# Altium PCB PCB_buck_converter_1_2024-08-31.pcbdoc
Units mm, origin at the board's own origin, x right, y up, seen from the top; angles counter-clockwise.
Board outline 82.04 x 82.98 mm, 2 copper layers (Top Layer, Bottom Layer); 31 components, 13 nets, 62 pads, 136 vias.
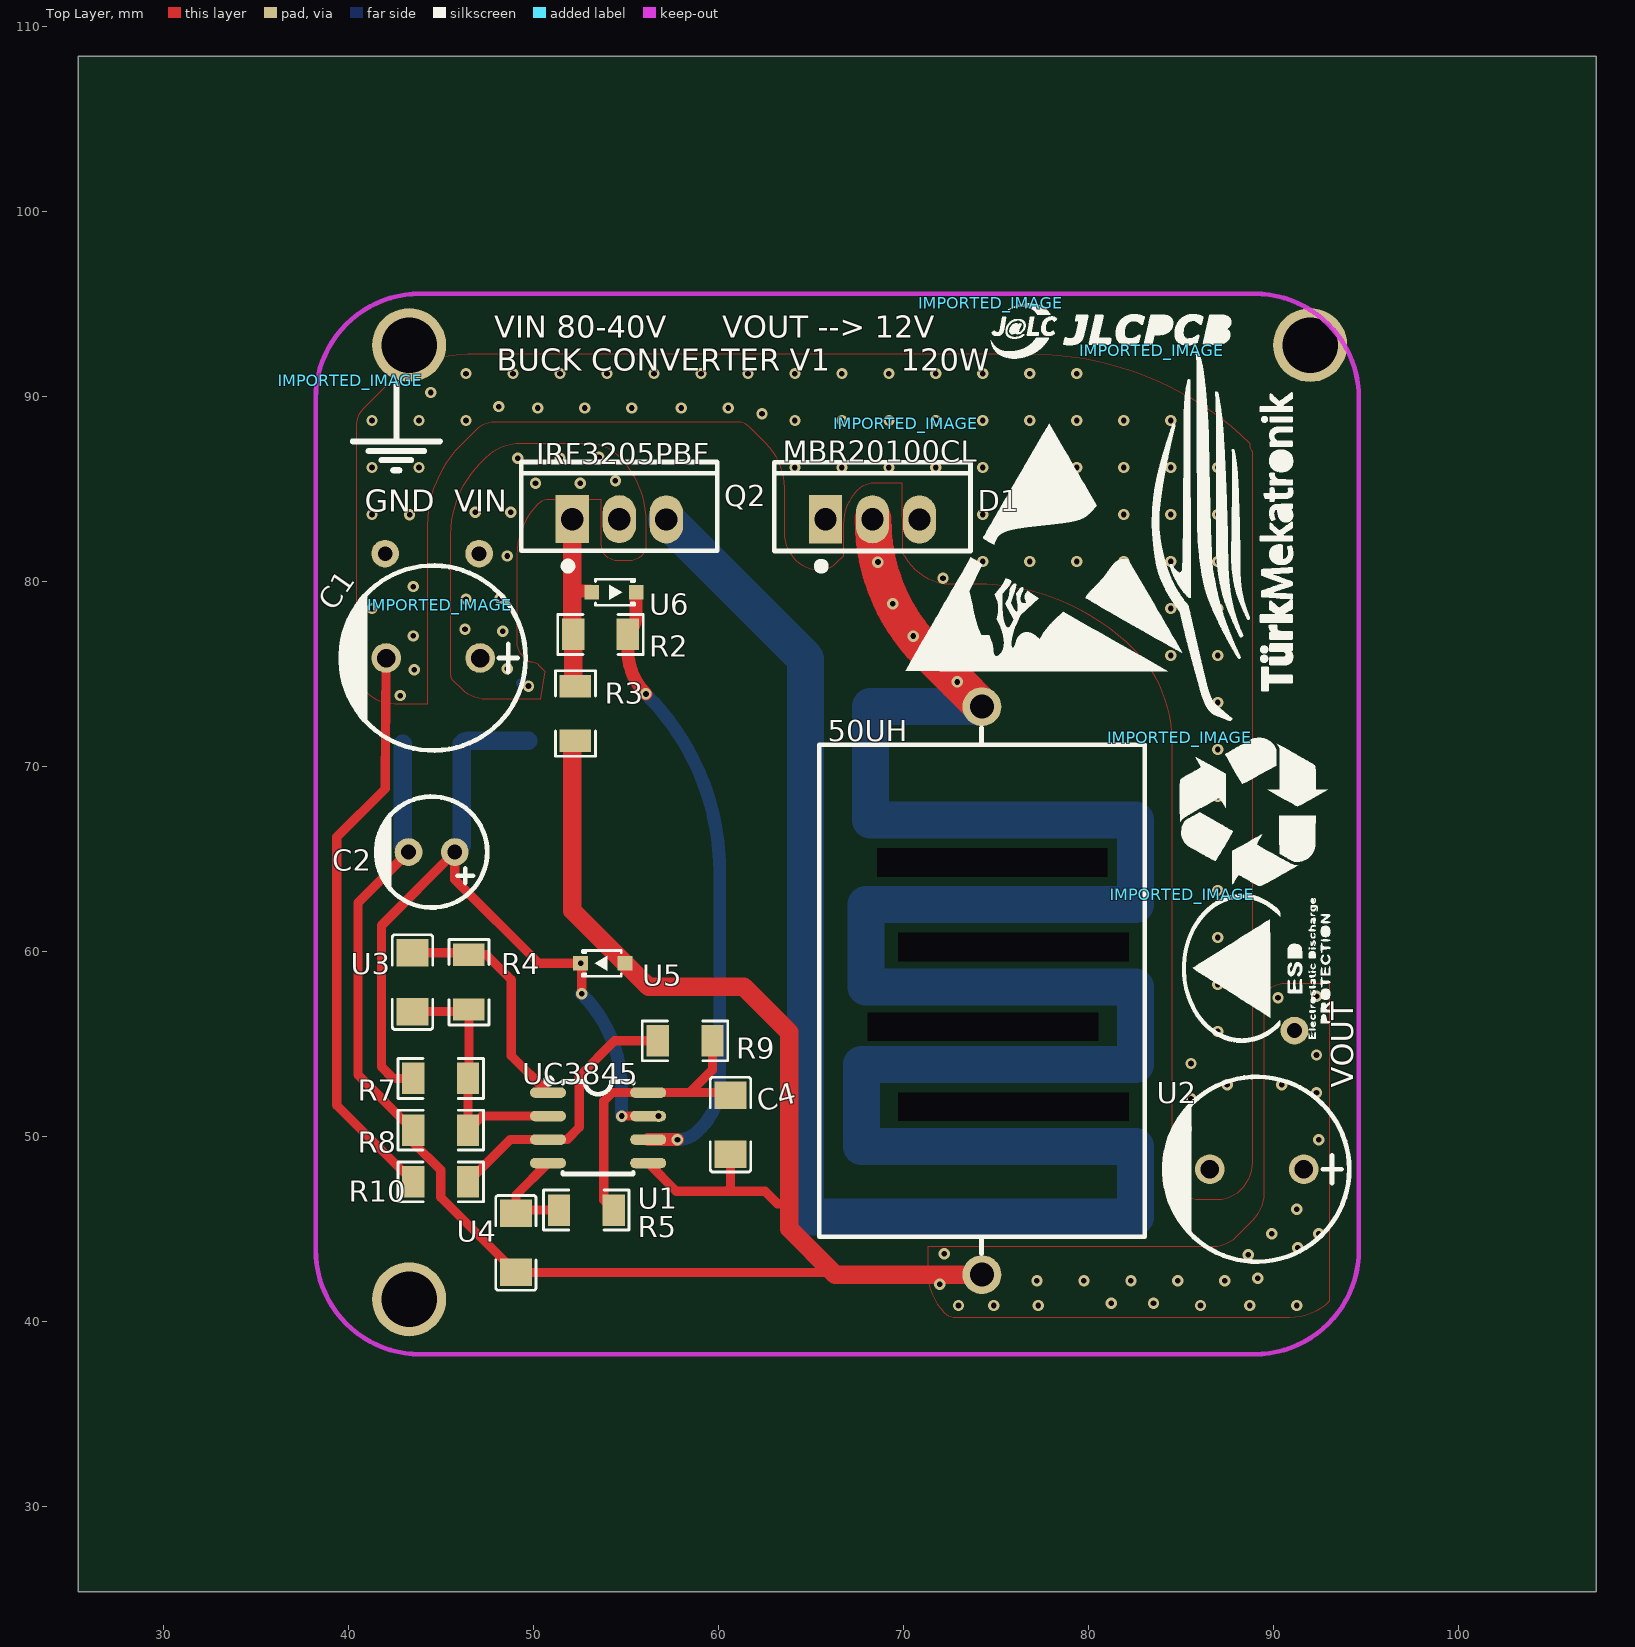
[diagram p0: Top Layer view]
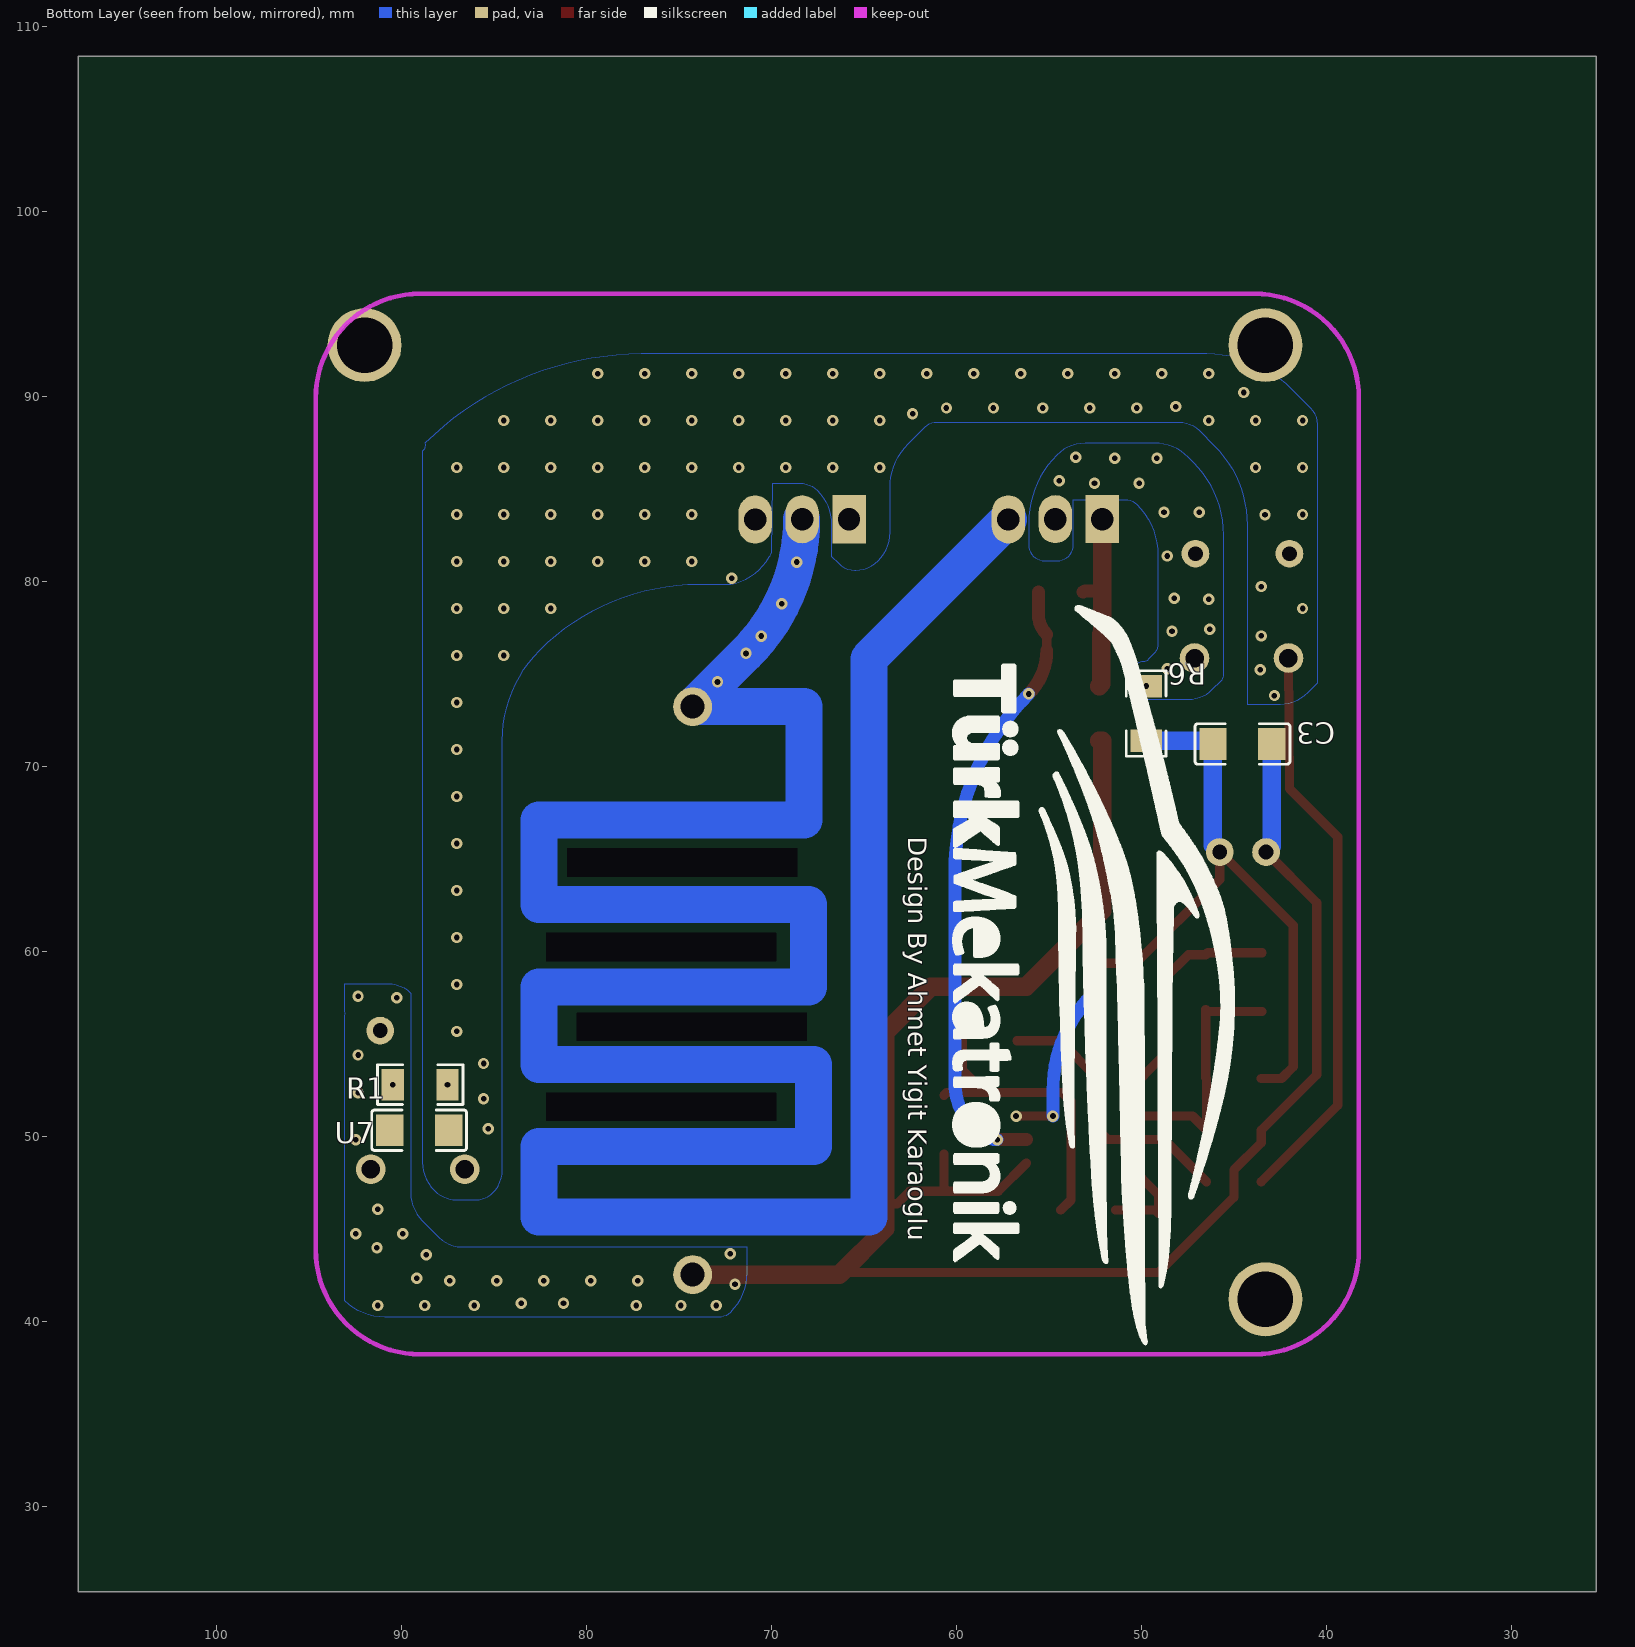
[diagram p1: Bottom Layer view, seen from below]

## Layer stack, top to bottom
Top Layer: signal copper (thickness not stored)
Dielectric: dielectric 0.32, FR-4, Dk 4.8
Bottom Layer: signal copper (thickness not stored)

## Board outline
107.442,25.4 25.4,25.4 25.4,108.382 107.442,108.382
cut-out: 69.718,61.005 82.164,61.005 82.164,59.481 82.037,59.481 69.718,59.481 69.718,61.005
cut-out: 68.575,65.577 81.021,65.577 81.021,64.053 80.894,64.053 68.575,64.053 68.575,65.577
cut-out: 68.067,56.687 80.513,56.687 80.513,55.163 80.386,55.163 68.067,55.163 68.067,56.687
cut-out: 69.718,52.369 82.164,52.369 82.164,50.845 82.037,50.845 69.718,50.845 69.718,52.369

## Components (designator, comment, footprint, x,y, rotation, side; value= is the part's Value field where it differs from the comment)
50UH "50uH" IND-TH_L26.6-W17.6-P30.60-D1.2 74.239,57.881 r270 top
C1 "100uF" CAP-TH_BD10.0-P5.00-D1.0-FD 44.572,75.864 r180 top
C2 "100uF" CAP-TH_BD6.0-P2.50-D0.5-FD 44.496,65.374 r180 top
C3 "100nF" C1206#1 44.521,71.216 r180 bottom
C4 "100nF" C1206#2 60.65,50.642 r90 top
D1 "MBR20100CL" TO-220-3_L10.0-W4.5-P2.54-L 68.321,83.357 r0 top
IMPORTED_IMAGE "IMPORTED_IMAGE" IMPORTED_IMAGE 44.93,78.703 r0 top
IMPORTED_IMAGE "IMPORTED_IMAGE" IMPORTED_IMAGE 83.426,92.466 r0 top
IMPORTED_IMAGE "IMPORTED_IMAGE" IMPORTED_IMAGE 84.937,71.543 r0 top
IMPORTED_IMAGE "IMPORTED_IMAGE" IMPORTED_IMAGE 85.068,63.064 r0 top
IMPORTED_IMAGE "IMPORTED_IMAGE" IMPORTED_IMAGE 40.085,90.85 r0 top
IMPORTED_IMAGE "IMPORTED_IMAGE" IMPORTED_IMAGE 74.719,95.041 r0 top
IMPORTED_IMAGE "IMPORTED_IMAGE" IMPORTED_IMAGE 70.117,88.519 r0 top
Q2 "IRF3205PBF" TO-220-3_L10.0-W4.5-P2.54-L 54.636,83.363 r0 top
R1 "360Ω" R1206#1 88.971,52.801 r180 bottom
R2 "2.2" R1206#2 53.62,77.14 r180 top
R3 "5.1k" R1206#2 52.268,72.867 r90 top
R4 "200k" R1206#2 46.508,58.344 r270 top
R5 "3.6k" R1206#2 52.858,46.025 r0 top
R6 "2.7k" R1206#1 49.728,72.867 r90 bottom
R7 "20k" R1206#2 44.984,53.137 r0 top
R8 "5.1k" R1206#2 44.984,50.343 r180 top
R9 "10k" R1206#2 58.192,55.169 r0 top
R10 "1k" R1206#2 44.984,47.549 r180 top
U1 "UC3845" SOIC-8_L5.0-W4.0-P1.27-LS6.0-BL 53.493,50.47 r270 top
U2 "1000uF" CAP-TH_BD10.0-P5.00-D1.0-FD 89.098,48.229 r180 top
U3 "330pF" C1206#2 43.46,58.344 r90 top
U4 "330pF" C1206#2 49.048,44.247 r90 top
U5 "1N4148WS(T4)" SOD-323_L1.7-W1.3-LS2.5-RD 53.747,59.36 r0 top
U6 "1N4148WS(T4)" SOD-323_L1.7-W1.3-LS2.5-RD 54.351,79.42 r180 top
U7 "100nf" C1206#1 89.022,50.337 r180 bottom

## Footprints (in the part's own frame and the unit in brackets; to place one, negate y for a bottom-side part, rotate by r counter-clockwise, add the part's x,y. Pads: shape width x height; smd on the part's side, far side on the other; paste and mask are expansions set on the pad)
C1206#1 [mm]
  rect 1.485x1.728 smd paste-100 mask+0.051: 1(1.593,0) 2(-1.593,0)
  silkscreen extent -2.56,-1.09 2.56,1.09
C1206#2 [mm]
  rect 1.485x1.728 smd paste-100 mask+0.051: 1(-1.593,0) 2(1.592,0)
  silkscreen extent -2.56,-1.09 2.56,1.09
CAP-TH_BD6.0-P2.50-D0.5-FD [mm]
  round 1.5 hole 0.8 paste+0 mask+0.051: 1(-1.25,0) 2(1.25,0)
  silkscreen extent -3,-3 3.08,3
CAP-TH_BD10.0-P5.00-D1.0-FD [mm]
  round 1.6 hole 1 paste+0 mask+0.051: 1(-2.54,0) 2(2.54,0)
  silkscreen extent -5,-5 5.08,5
IMPORTED_IMAGE [mm]
IND-TH_L26.6-W17.6-P30.60-D1.2 [mm]
  round 2.1 hole 1.3 paste+0 mask+0.05: 1(-15.35,0) 2(15.35,0)
  silkscreen extent -14.22,-8.8 14.22,8.8
R1206#1 [mm]
  rect 1.208x1.701 smd paste-100 mask+0.051: 1(1.479,0) 2(-1.479,0)
  silkscreen extent -2.31,-1.08 2.31,1.08
R1206#2 [mm]
  rect 1.208x1.701 smd paste-100 mask+0.051: 1(-1.479,0) 2(1.479,0)
  silkscreen extent -2.31,-1.08 2.31,1.08
SOD-323_L1.7-W1.3-LS2.5-RD [mm]
  rect 0.8x0.8 smd paste+0 mask+0.051: 1(-1.2,0) 2(1.2,0)
  silkscreen extent -1.1,-0.7 1,0.7
SOIC-8_L5.0-W4.0-P1.27-LS6.0-BL [mil]
  oval 22.38x76.78 smd paste+0 mask+2: 1(-75,-106.5) 2(-25,-106.5) 3(25,-106.5) 4(75,-106.5) 5(75,106.5) 6(25,106.5) 7(-25,106.5) 8(-75,106.5)
  silkscreen extent -106,-111 98,75
TO-220-3_L10.0-W4.5-P2.54-L [mm]
  rect 1.8x2.6 hole 1.2 paste+0 mask+0.051: 1(-2.54,0.005)
  oval 1.8x2.6 hole 1.2 paste+0 mask+0.051: 2(0,0.005) 3(2.54,-0.005)
  silkscreen extent -5.3,-2.73 5.3,3.09

## Free pads (board coordinates)
  round 1.5 hole 0.8 paste+0 mask+0.051: 1(91.13,55.722) 2(47.061,81.503) 3(41.981,81.503)
  round 4 hole 3 paste+0.102 mask+0.051: 4(43.276,41.201) 4(43.276,92.781) 4(91.976,92.781)

## Via types
v1: diameter 0.61, hole 0.305, Top Layer to Bottom Layer, tented both sides, 121 vias
v2: diameter 0.62, hole 0.31, Top Layer to Bottom Layer, tented both sides, 15 vias

## Nets (pads, with @x,y where several pads share a name; then routed paths per layer and width w, separated by ;. In a path a pad name is that pad's centre, name@x,y a point inside that pad or via, vN(x,y) a via of type N, cw(c..) or ccw(c..) an arc to the next point about the centre after c; other vN are vias at no path point)
FB: 50UH.2 C2.2 C3.1 C4.1 pad.1 R1.2 R3.1 R8.2 U1.5 U2.1 U4.1 U5.2 U7.2 | length 107.5
  Top Layer w0.5: C2.2 40.508,62.636 40.508,53.34 R8.2 43.505,49.663 44.984,48.184 44.984,46.718 U4.1 66.315,42.654 66.315,42.532 ; U1.5 57.722,47.041 60.478,47.041 60.65,47.213 C4.1 ; 60.224,47.041 62.51,47.041 63.186,46.364 63.823,46.364
  Top Layer w1: R3.1 52.096,71.388 52.096,62.211 U5.2 ; U5.2@54.946,59.36 56.216,58.09 61.367,58.09 63.823,55.634 63.823,45.024 66.316,42.531 50UH.2
  Bottom Layer w1: C3.1 42.928,65.692 C2.2
  other v1: 72.969,40.863 74.874,40.863 77.287,40.863 86.05,40.863 88.717,40.863 81.224,40.99 83.51,40.99 71.953,42.006 77.211,42.209 79.751,42.209 82.291,42.209 84.831,42.209 87.371,42.209 89.149,42.336 88.641,43.606 72.207,43.657 91.308,43.987 89.911,44.749 92.451,44.749 91.257,46.07 92.451,49.829 92.324,52.369 92.324,54.401 90.241,57.5 92.324,57.576
  other v2: 90.45,52.801
GND: C1.2 D1.1 D1.3 pad.3 R1.1 R10.2 U2.2 U7.1 | length 31.1
  Top Layer w0.5: C1.2 41.982,68.803 39.365,66.187 39.365,51.689 R10.2
  other v1: 85.288,50.418 85.542,52.039 85.542,53.944 86.99,55.679 86.99,58.219 86.99,60.759 86.99,63.299 86.99,65.839 86.99,68.379 86.99,70.919 86.99,73.459 42.794,73.832 43.556,75.229 84.45,75.999 86.99,75.999 43.505,77.058 41.27,78.539 81.91,78.539 84.45,78.539 86.99,78.539 43.505,79.725 72.131,80.182 74.29,81.079 76.83,81.079 79.37,81.079 81.91,81.079 84.45,81.079 86.99,81.079 41.27,83.619 43.302,83.611 74.29,83.619 76.83,83.619 79.37,83.619 81.91,83.619 84.45,83.619 86.99,83.619 41.27,86.159 43.81,86.159 64.13,86.159 66.67,86.159 69.21,86.159 71.75,86.159 74.29,86.159 76.83,86.159 79.37,86.159 81.91,86.159 84.45,86.159 86.99,86.159 41.27,88.699 43.81,88.699 46.35,88.699 64.13,88.699 66.67,88.699 69.21,88.699 71.75,88.699 74.29,88.699 76.83,88.699 79.37,88.699 81.91,88.699 84.45,88.699 62.352,89.072 50.236,89.377 52.776,89.377 55.316,89.377 57.983,89.377 60.523,89.377 48.128,89.453 44.445,90.215 46.35,91.239 48.89,91.239 51.43,91.239 53.97,91.239 56.51,91.239 59.05,91.239 61.59,91.239 64.13,91.239 66.67,91.239 69.21,91.239 71.75,91.239 74.29,91.239 76.83,91.239 79.37,91.239
  other v2: 87.492,52.801
OUT: R2.1 U1.6 U6.1 | length 33.7
  Top Layer w0.5: 55.098,76.282 R2.1
  Top Layer w0.7: 55.098,76.282 ccw(c58.438,76.282) v2(56.077,73.921) ; R2.1 ccw(c54.007,78.232) 55.551,78.232 U6.1 ; U1.6 v2(57.78,49.829)
  Bottom Layer w0.7: v2(56.077,73.921) cw(c46.446,64.29) 60.066,64.29 60.066,62.91 60.066,52.917 cw(c56.597,52.917) 59.05,50.464 58.864,50.278 cw(c57.78,51.362) v2(57.78,49.829)
Q2_1: Q2.1 R2.2 R3.2 U6.2 | length 10.2
  Top Layer w0.7: 52.096,79.48 53.007,79.48 cw(c53.007,79.276) U6.2
  Top Layer w1: Q2.1 52.096,77.185 R2.2 52.141,74.473 R3.2
Q2_3: 50UH.1 D1.2 Q2.3 | length 189.7
  Top Layer w2: D1.2@68.352,83.368 ccw(c78.611,83.368) v2(71.356,76.113) v2(72.898,74.572) 50UH.1
  Bottom Layer w2: Q2.3 64.715,75.819 64.715,45.638 82.545,45.638 82.545,49.454 67.717,49.454 67.717,53.893 82.545,53.893 82.545,58.09 67.971,58.09 67.971,62.535 82.545,62.535 82.545,67.107 68.225,67.107 68.225,73.231 50UH.1 v2(71.356,76.113) cw(c78.611,83.368) D1.2@68.352,83.368
  other v2: 70.529,77.048 69.424,78.801 68.617,81.05
S$1126: 
U1_1: R4.1 U1.1 U3.2 | length 12.9
  Top Layer w0.5: U3.2 46.394,59.936 R4.1 47.442,59.823 48.794,58.471 48.794,54.369 U1.1
U1_2: R4.2 R7.2 R8.1 U1.2 U3.1 | length 14.3
  Top Layer w0.5: U3.1 46.394,56.751 R4.2 46.508,53.182 R7.2 R8.1 47.224,51.105 U1.2
U1_4: R5.1 U1.4 U4.2 | length 5.9
  Top Layer w0.5: U1.4 49.048,46.825 U4.2 49.233,46.025 R5.1
U1_7: C2.1 C3.2 R6.2 R7.1 U1.7 U5.1 | length 45.9
  Top Layer w0.5: R7.1 42.408,53.137 41.778,53.766 41.778,61.404 C2.1 ; C2.1 45.746,63.895 50.281,59.36 v2(52.547,59.36) 52.604,59.303 52.604,58.402 v2(52.604,57.709) ; v2(54.763,51.105) U1.7 v2(56.756,51.105)
  Bottom Layer w0.7: v2(52.604,57.709) cw(c47.391,52.496) 54.763,52.496 v2(54.763,51.105)
  Bottom Layer w1: C2.1 46.114,65.741 C3.2 cw(c46.529,70.8) 46.529,71.388 R6.2
U1_8: C4.2 R5.2 R9.2 U1.8 | length 16.5
  Top Layer w0.5: R5.2 53.792,46.569 53.792,51.912 54.255,52.375 U1.8 58.446,52.375 ; R9.2 59.67,53.6 58.446,52.375 ; C4.2 60.51,52.375 58.446,52.375
VIN: C1.1 pad.2 Q2.2 R6.1 | length 0.5
  Bottom Layer w0.5: R6.1@49.312,74.518 cw(c49.312,73.93) v2(49.728,74.346)
  other v1: 48.331,77.312 46.295,77.418 46.35,79.039 48.204,79.09 48.585,81.376 46.858,83.738 48.763,83.738 50.109,85.313 52.522,85.313 54.427,85.44 49.144,86.659 51.43,86.659 53.538,86.71
  other v2: 48.585,75.28
VSENSE: R9.1 R10.1 U1.3 | length 15
  Top Layer w0.5: R10.1 48.748,49.835 U1.3 51.816,49.835 52.477,50.495 52.477,53.264 54.382,55.169 R9.1
copper on no net:
  other v1: 91.257,40.863

## Polygon pours and split planes (outlines as drawn)
VIN on Bottom Layer (solid): 50.363,73.629 47.442,73.629 cw(c47.442,75.469) 46.141,74.168 45.664,74.645 cw(c45.971,74.952) 45.537,74.952 45.537,82.519 cw(c51.056,82.519) 47.153,86.421 47.442,86.71 cw(c49.282,84.87) 49.282,87.472 51.379,87.472 53.021,87.472 cw(c53.021,85.304) 54.554,86.837 cw(c50.875,83.158) 56.078,83.158 56.078,82.392 56.078,81.989 cw(c55.211,81.989) 55.824,81.376 cw(c55.211,81.989) 55.211,81.122 54.808,81.122 54.532,81.122 cw(c54.532,81.989) 53.919,81.376 cw(c54.532,81.989) 53.665,81.989 53.665,84.424 50.849,84.424 ccw(c50.849,83.557) 50.236,84.17 ccw(c52.995,81.411) 49.093,81.411 49.093,76.677 ccw(c50.013,76.677) 49.362,76.027 49.601,75.788 49.638,75.751 ccw(c49.855,75.968) 49.855,75.661 cw(c49.855,75.048) 50.289,75.481 50.617,75.153
GND on Bottom Layer (solid): 42.489,73.375 cw(c42.489,75.521) 40.971,74.004 40.457,74.518 40.457,88.488 cw(c41.683,88.488) 40.816,89.355 41.854,90.393 cw(c46.453,85.794) 46.453,92.298 69.286,92.298 77.013,92.298 cw(c76.887,75.388) 88.717,87.472 ccw(c89.136,87.359) 88.844,87.038 88.844,52.928 88.844,48.619 cw(c86.676,48.619) 88.209,47.086 cw(c86.982,48.312) 86.983,46.578 86.05,46.578 85.954,46.578 cw(c85.954,47.879) 85.034,46.959 cw(c86.26,48.185) 84.526,48.185 84.526,57.373 84.526,71.39 ccw(c77.588,71.39) 82.494,76.296 ccw(c73.909,67.711) 73.909,79.852 73.223,79.852 72.194,79.852 cw(c72.729,82.84) 70.099,81.325 cw(c70.402,81.635) 69.972,81.579 69.921,85.313 68.428,85.313 ccw(c68.428,84.012) 67.508,84.932 ccw(c69.348,83.092) 66.746,83.092 66.746,82.519 66.746,81.376 66.343,80.973 cw(c65.476,81.84) 65.476,80.614 65.432,80.614 cw(c65.432,82.348) 64.206,81.122 cw(c65.739,82.655) 63.571,82.655 63.571,85.059 ccw(c60.198,85.059) 62.583,87.444 61.666,88.361 ccw(c61.053,87.748) 61.053,88.615 47.95,88.615 ccw(c47.95,87.082) 46.866,88.166 46.045,87.345 ccw(c50.337,83.052) 44.267,83.052 44.267,73.375 42.489,73.375
FB on Bottom Layer (solid): 71.318,43.022 71.318,42.628 ccw(c74.353,42.628) 72.207,40.482 ccw(c72.82,41.095) 72.82,40.228 90.495,40.228 90.889,40.228 ccw(c90.889,43.263) 93.035,41.117 93.035,50.896 93.035,56.558 cw(c93.459,56.648) 93.035,56.738 93.035,58.262 91.765,58.262 91.638,58.262 ccw(c91.638,58.262) 91.638,58.262 90.705,58.262 ccw(c90.705,56.528) 89.479,57.754 89.479,46.959 cw(c87.333,46.959) 88.85,45.441 87.955,44.546 cw(c86.728,45.772) 86.729,44.038 75.255,44.038 71.318,44.038
VIN on Top Layer (solid): 50.363,73.629 47.442,73.629 cw(c47.442,75.469) 46.141,74.168 45.664,74.645 cw(c45.971,74.952) 45.537,74.952 45.537,82.519 cw(c51.056,82.519) 47.153,86.421 47.442,86.71 cw(c49.282,84.87) 49.282,87.472 51.379,87.472 53.021,87.472 cw(c53.021,85.304) 54.554,86.837 cw(c50.875,83.158) 56.078,83.158 56.078,82.392 56.078,81.989 cw(c55.211,81.989) 55.824,81.376 cw(c55.211,81.989) 55.211,81.122 54.808,81.122 54.532,81.122 cw(c54.532,81.989) 53.919,81.376 cw(c54.532,81.989) 53.665,81.989 53.665,84.424 50.849,84.424 ccw(c50.849,83.557) 50.236,84.17 ccw(c52.995,81.411) 49.093,81.411 49.093,76.677 ccw(c50.013,76.677) 49.362,76.027 49.601,75.788 49.638,75.751 ccw(c49.855,75.968) 49.855,75.661 cw(c49.855,75.048) 50.289,75.481 50.617,75.153
FB on Top Layer (solid): 71.318,43.022 71.318,42.628 ccw(c74.353,42.628) 72.207,40.482 ccw(c72.82,41.095) 72.82,40.228 90.495,40.228 90.889,40.228 ccw(c90.889,43.263) 93.035,41.117 93.035,50.896 93.035,56.558 cw(c93.459,56.648) 93.035,56.738 93.035,58.262 91.765,58.262 91.638,58.262 ccw(c91.638,58.262) 91.638,58.262 90.705,58.262 ccw(c90.705,56.528) 89.479,57.754 89.479,46.959 cw(c87.333,46.959) 88.85,45.441 87.955,44.546 cw(c86.728,45.772) 86.729,44.038 75.255,44.038 71.318,44.038
GND on Top Layer (solid): 42.489,73.375 cw(c42.489,75.521) 40.971,74.004 40.457,74.518 40.457,88.488 cw(c41.683,88.488) 40.816,89.355 41.854,90.393 cw(c46.453,85.794) 46.453,92.298 69.286,92.298 77.013,92.298 cw(c76.887,75.388) 88.717,87.472 ccw(c89.136,87.359) 88.844,87.038 88.844,52.928 88.844,48.619 cw(c86.676,48.619) 88.209,47.086 cw(c86.982,48.312) 86.983,46.578 86.05,46.578 85.954,46.578 cw(c85.954,47.879) 85.034,46.959 cw(c86.26,48.185) 84.526,48.185 84.526,57.373 84.526,71.39 ccw(c77.588,71.39) 82.494,76.296 ccw(c73.909,67.711) 73.909,79.852 73.223,79.852 72.194,79.852 cw(c72.729,82.84) 70.099,81.325 cw(c70.402,81.635) 69.972,81.579 69.921,85.313 68.428,85.313 ccw(c68.428,84.012) 67.508,84.932 ccw(c69.348,83.092) 66.746,83.092 66.746,82.519 66.746,81.376 66.343,80.973 cw(c65.476,81.84) 65.476,80.614 65.432,80.614 cw(c65.432,82.348) 64.206,81.122 cw(c65.739,82.655) 63.571,82.655 63.571,85.059 ccw(c60.198,85.059) 62.583,87.444 61.666,88.361 ccw(c61.053,87.748) 61.053,88.615 47.95,88.615 ccw(c47.95,87.082) 46.866,88.166 46.045,87.345 ccw(c50.337,83.052) 44.267,83.052 44.267,73.375 42.489,73.375

## Keep-outs
Keep-Out Layer:
  lines w0.254: 38.227,43.866 ccw(c43.866,43.866) 43.866,38.227 ; 38.227,89.916 cw(c43.866,89.916) 43.866,95.555 ; 88.976,38.227 ccw(c88.976,43.866) 94.615,43.866 ; 88.976,95.555 cw(c88.976,89.916) 94.615,89.916

## Silkscreen, mask and mechanical layers (free items; w line width, h text height)
Top Overlay:
  text "VIN 80-40V" at 47.874,93.171 h1.2
  text "VOUT --> 12V" at 60.193,93.171 h1.2
  text "BUCK CONVERTER V1" at 48.001,91.393 h1.2
  text "120W" at 69.845,91.393 h1.2
  text "GND" at 40.889,83.773 h1.2
  text "VIN" at 45.715,83.773 h1.2
  text "VOUT" at 94.321,52.623 h1.2 r90
Bottom Overlay:
  text "Design By Ahmet Yigit Karaoglu" at 62.598,66.212 h1 r90